# Allegro board bottom.brd
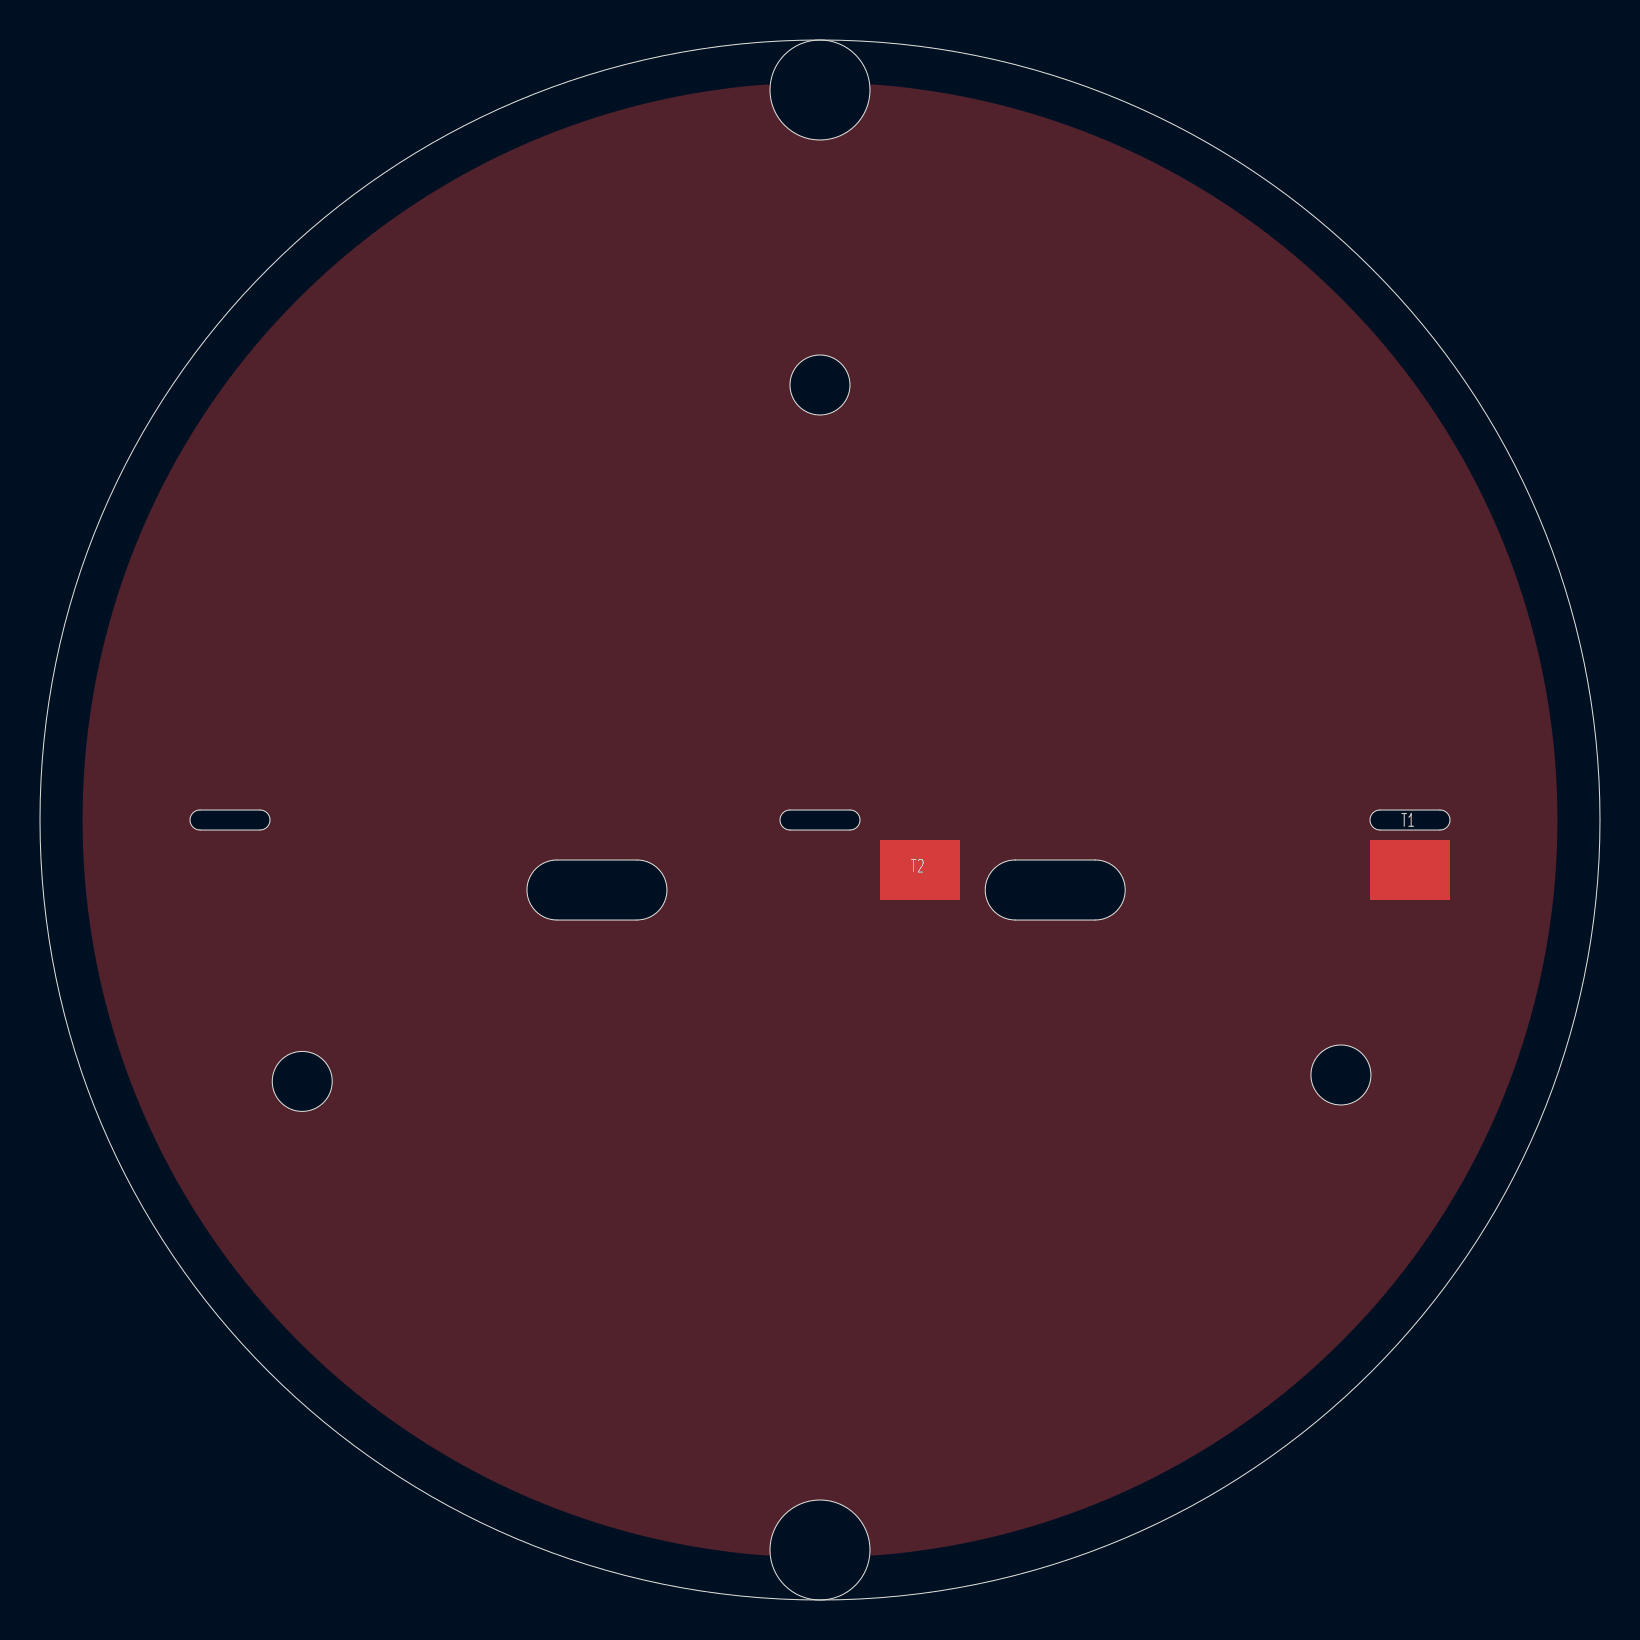
[diagram p0: board, top side]
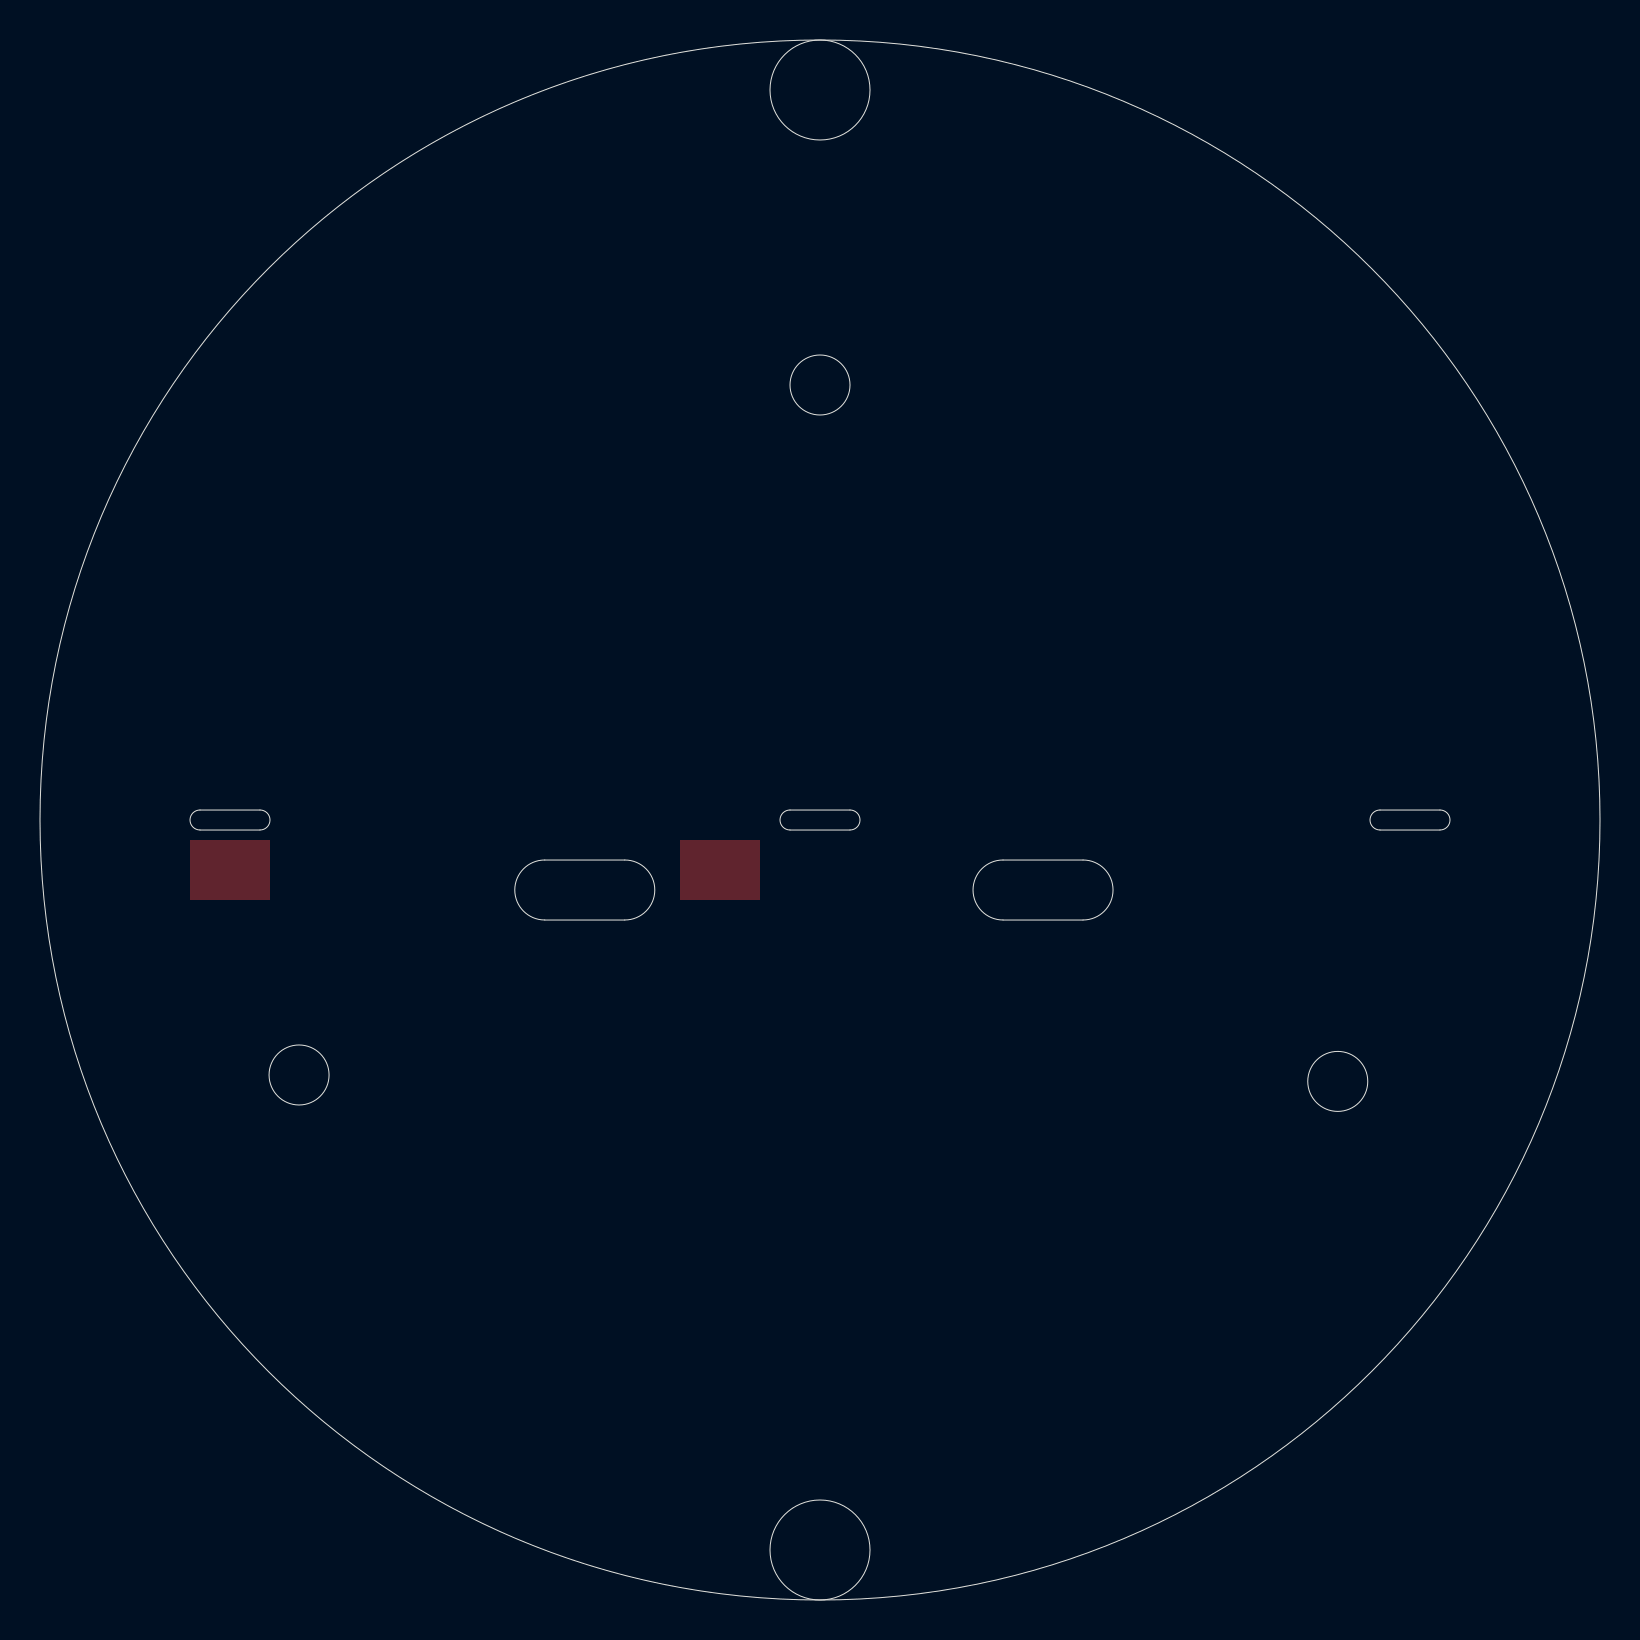
[diagram p1: board, bottom side, seen from below]

Outline 78 x 78 mm; copper layers: TOP, BOTTOM. Coordinates in mm from the lower left corner of the outline.
Outline path: circle c13.11,25.93 r1.5 ; circle c39,75.5 r2.5 ; circle c39,60.75 r1.5 ; circle c39,39 r39 ; circle c39,2.5 r2.5 ; circle c65.05,26.25 r1.5 ; 8,39.5 11,39.5 arc(11.5,39) 11,38.5 8,38.5 arc(7.5,39) 8,39.5 ; 25.85,37 29.85,37 arc(31.35,35.5) 29.85,34 25.85,34 arc(24.35,35.5) 25.85,37 ; 37.5,39.5 40.5,39.5 arc(41,39) 40.5,38.5 37.5,38.5 arc(37,39) 37.5,39.5 ; 48.76,37 52.76,37 arc(54.26,35.5) 52.76,34 48.76,34 arc(47.26,35.5) 48.76,37 ; 67,39.5 70,39.5 arc(70.5,39) 70,38.5 67,38.5 arc(66.5,39) 67,39.5

## Placement (name value [footprint] x y rotation side)
T1  TEST  [TP_3X3]  68.5 36.5 0 top
T2  TEST  [TP_3X3]  44 36.5 0 top

## Library data of the parts
T1 T2 = TEST

## Footprints (pads in the part's own frame, mm; a bottom-side part is the same pattern mirrored in y, then rotated)
TP_3X3
  rect 4x3 smd: 1(0,0)

## Nets
GND: T1.1(TP) T2.1(TP)

## Copper pours and planes (outline as drawn; the poured copper is in the pictures)
GND on TOP: 75.87,39 2.13,39
